# EAGLE board test8_811-3s (EAGLE 6.0)
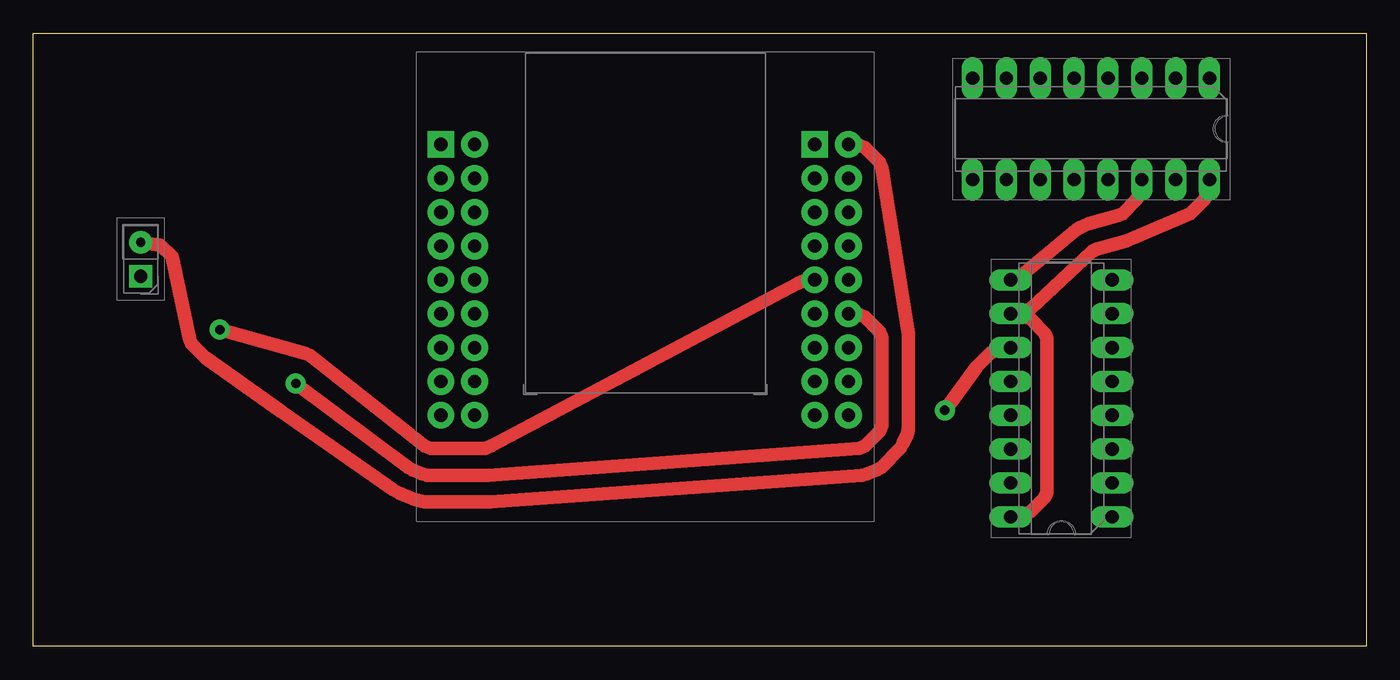
[diagram p0: board, top side]
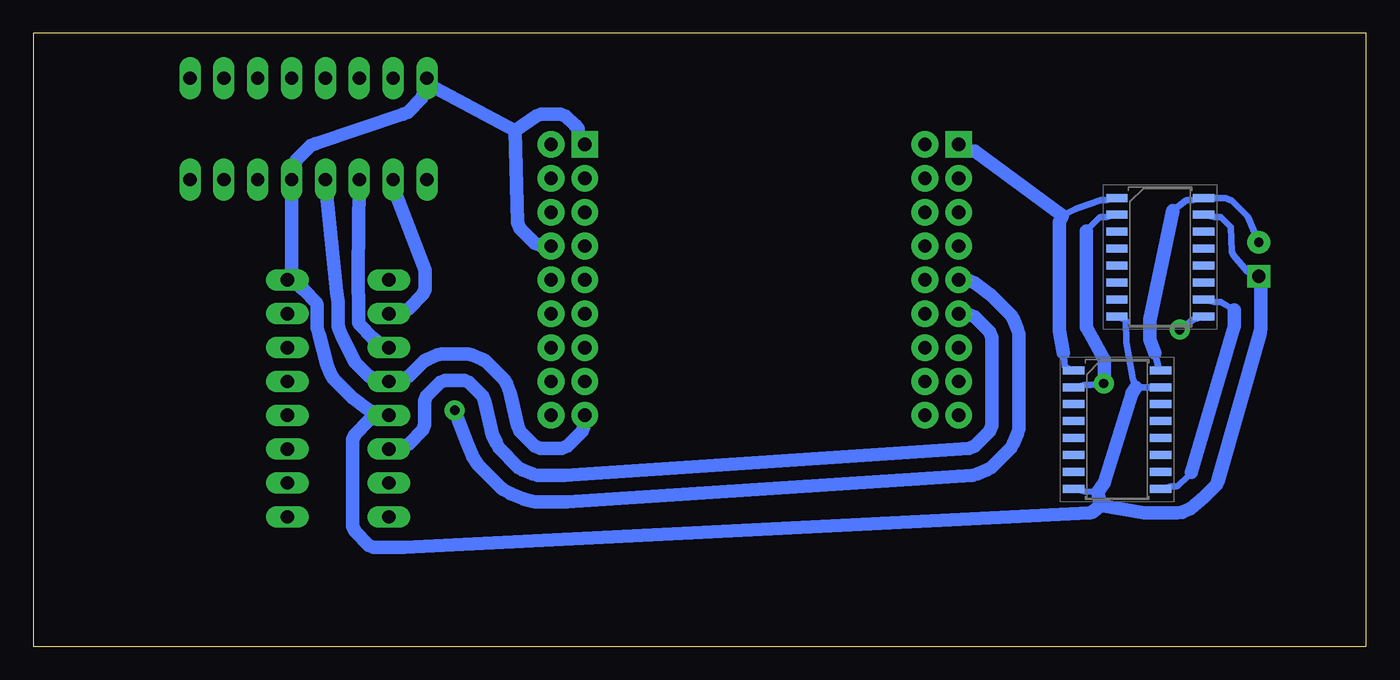
[diagram p1: board, bottom side, seen from below]

Size 100 x 46 mm. Coordinates in mm from the lower left corner, seen from the top.
Outline: 100,0 0,0 0,46 100,46 100,0
Copper layers 1+16: F.Cu 0.0035mm / dielectric 0.15mm / B.Cu 0.0035mm
Design rules: minimum track width 0.5mm, track to track 0.5mm, copper to edge 0.3mm, minimum pad ring 0.1mm, minimum via ring 0.1mm
Net classes: 0 kicad_default: width 0.5 mm, clearance 1 mm; 1 esp: width 0.5 mm, clearance 1 mm to class 0, clearance 0.5 mm

## Footprints (pad centres in the part's own frame; a part is rotated, then mirrored left to right if it is on the bottom)
Connector_PinHeader_2.54mm:PinHeader_1x02_P2.54mm_Vertical = drill 1 pad 1.7 square: 1 0,0 | drill 0.7 pad 1.7: 2 0,-2.54
Package_SO:SOP-16_4.55x10.3mm_P1.27mm = smd 1.601 x 0.601: 1 -3.25,4.445; 2 -3.25,3.175; 3 -3.25,1.905; 4 -3.25,0.635; 5 -3.25,-0.635; 6 -3.25,-1.905; 7 -3.25,-3.175; 8 -3.25,-4.445; 9 3.25,-4.445; 10 3.25,-3.175; 11 3.25,-1.905; 12 3.25,-0.635; 13 3.25,0.635; 14 3.25,1.905; 15 3.25,3.175; 16 3.25,4.445
main:ESP32-WROOM-32 = drill 1 pad 2 square: 1 12.7,12.835; 5 -15.35,12.835 | drill 1 pad 2: 2 15.24,12.835; 3 12.7,10.295; 4 -12.81,12.835; 6 -12.81,10.295; 7 -15.35,10.295; 8 -12.81,7.755; 9 -15.35,7.755; 10 -12.81,5.215; 11 -15.35,5.215; 12 -12.81,2.675; 13 -15.35,2.675; 14 -12.81,0.135; 16 -15.35,0.135; 17 -12.81,-2.405; 18 -15.35,-2.405; 19 -12.81,-4.945; 20 -15.35,-4.945; 21 -12.81,-7.485; 22 -15.35,-7.485; 23 12.7,-7.485; 24 15.24,-7.485; 25 12.7,-4.945; 26 15.24,-4.945; 27 12.7,-2.405; 28 15.24,-2.405; 29 12.7,0.135; 30 15.24,0.135; 31 12.7,2.675; 33 15.24,2.675; 34 15.24,7.755; 35 15.24,10.295; 36 12.7,5.215; 37 12.7,7.755; 38 15.24,5.215
Package_DIP:DIP-16_W7.62mm_LongPads = drill 1 pad 1.6 long: 1 0,0; 2 0,-2.54; 3 0,-5.08; 4 0,-7.62; 5 0,-10.16; 6 0,-12.7; 7 0,-15.24; 8 0,-17.78; 9 7.62,-17.78; 10 7.62,-15.24; 11 7.62,-12.7; 12 7.62,-10.16; 13 7.62,-7.62; 14 7.62,-5.08; 15 7.62,-2.54; 16 7.62,0

## Placement (x,y rotation side)
J1  [Connector_PinHeader_2.54mm:PinHeader_1x02_P2.54mm_Vertical]  8.05,27.77 180 top
U1  [Package_SO:SOP-16_4.55x10.3mm_P1.27mm]  15.45,29.2 0 bottom
U2  [Package_SO:SOP-16_4.55x10.3mm_P1.27mm]  18.69,16.26 0 bottom
U3  [main:ESP32-WROOM-32]  45.92,24.82 0 top
U4  [Package_DIP:DIP-16_W7.62mm_LongPads]  80.94,9.71 180 top
U5  [Package_DIP:DIP-16_W7.62mm_LongPads]  88.25,42.64 270 top

## Library data of the parts
J1 U1-U5 = TopoR

## Nets
+3.3V: J1.2 U1.16 U2.16 U3.2
+5V: U4.10 U4.16 U5.10 U5.16
CLK_165: U1.2 U2.2 U3.30
CS_165: U1.1 U2.1 U3.5
GND: J1.1 U1.8 U1.15 U2.8 U2.15 U3.1 U3.38 U4.8 U4.13 U5.8 U5.13
MISO_165: U1.9 U3.31
Net-(U1-DS): U1.10 U2.9
Net-(U3-IO13) [esp]: U3.16 U4.14
Net-(U3-IO14) [esp]: U3.13 U4.11 U5.11
Net-(U3-IO15) [esp]: U3.23 U4.12 U5.12
Net-(U4-QH'): U4.9 U5.14
unconnected-(U1-D0-Pad11): U1.11
unconnected-(U1-D1-Pad12): U1.12
unconnected-(U1-D2-Pad13): U1.13
unconnected-(U1-D3-Pad14): U1.14
unconnected-(U1-D4-Pad3): U1.3
unconnected-(U1-D5-Pad4): U1.4
unconnected-(U1-D6-Pad5): U1.5
unconnected-(U1-D7-Pad6): U1.6
unconnected-(U1-~{Q7}-Pad7): U1.7
unconnected-(U2-D0-Pad11): U2.11
unconnected-(U2-D1-Pad12): U2.12
unconnected-(U2-D2-Pad13): U2.13
unconnected-(U2-D3-Pad14): U2.14
unconnected-(U2-D4-Pad3): U2.3
unconnected-(U2-D5-Pad4): U2.4
unconnected-(U2-D6-Pad5): U2.5
unconnected-(U2-D7-Pad6): U2.6
unconnected-(U2-DS-Pad10): U2.10
unconnected-(U2-~{Q7}-Pad7): U2.7
unconnected-(U3-EN-Pad3) [esp]: U3.3
unconnected-(U3-IO0-Pad25) [esp]: U3.25
unconnected-(U3-IO2-Pad24) [esp]: U3.24
unconnected-(U3-IO4-Pad26) [esp]: U3.26
unconnected-(U3-IO5-Pad29) [esp]: U3.29
unconnected-(U3-IO12-Pad14) [esp]: U3.14
unconnected-(U3-IO16-Pad27) [esp]: U3.27
unconnected-(U3-IO17-Pad28) [esp]: U3.28
unconnected-(U3-IO21-Pad33) [esp]: U3.33
unconnected-(U3-IO22-Pad36) [esp]: U3.36
unconnected-(U3-IO23-Pad37) [esp]: U3.37
unconnected-(U3-IO25-Pad10) [esp]: U3.10
unconnected-(U3-IO26-Pad11) [esp]: U3.11
unconnected-(U3-IO27-Pad12) [esp]: U3.12
unconnected-(U3-IO32-Pad8) [esp]: U3.8
unconnected-(U3-IO33-Pad9) [esp]: U3.9
unconnected-(U3-IO34-Pad6) [esp]: U3.6
unconnected-(U3-IO35-Pad7) [esp]: U3.7
unconnected-(U3-RXD0{slash}IO3-Pad34) [esp]: U3.34
unconnected-(U3-SCK{slash}CLK-Pad20) [esp]: U3.20
unconnected-(U3-SCS{slash}CMD-Pad19) [esp]: U3.19
unconnected-(U3-SDI{slash}SD1-Pad22) [esp]: U3.22
unconnected-(U3-SDO{slash}SD0-Pad21) [esp]: U3.21
unconnected-(U3-SENSOR_VP-Pad4) [esp]: U3.4
unconnected-(U3-SHD{slash}SD2-Pad17) [esp]: U3.17
unconnected-(U3-SWP{slash}SD3-Pad18) [esp]: U3.18
unconnected-(U3-TXD0{slash}IO1-Pad35) [esp]: U3.35
unconnected-(U4-QA-Pad15): U4.15
unconnected-(U4-QB-Pad1): U4.1
unconnected-(U4-QC-Pad2): U4.2
unconnected-(U4-QD-Pad3): U4.3
unconnected-(U4-QE-Pad4): U4.4
unconnected-(U4-QF-Pad5): U4.5
unconnected-(U4-QG-Pad6): U4.6
unconnected-(U4-QH-Pad7): U4.7
unconnected-(U5-QA-Pad15): U5.15
unconnected-(U5-QB-Pad1): U5.1
unconnected-(U5-QC-Pad2): U5.2
unconnected-(U5-QD-Pad3): U5.3
unconnected-(U5-QE-Pad4): U5.4
unconnected-(U5-QF-Pad5): U5.5
unconnected-(U5-QG-Pad6): U5.6
unconnected-(U5-QH'-Pad9): U5.9
unconnected-(U5-QH-Pad7): U5.7

## Tracks (layer width: path | path; a pad name or v marks a point on that pad's centre or on a via)
+3.3V
  F.Cu 1: J1.2 9.48,30.12 9.56,30.09 10.37,29.28 10.4,29.19 11.74,23.03 11.89,22.67 12.91,21.65 18.61,17.61 26.97,11.78 27.49,11.47 27.58,11.42 28.5,11.04 28.59,11.01 29.19,10.86 29.36,10.83 31.9,10.83 34.32,10.83 62.18,12.83 62.56,12.93 63.29,13.23 63.62,13.43 65.06,14.87 65.26,15.2 65.56,15.93 65.66,16.31 65.66,18.36 65.66,23.44 63.66,35.89 63.47,36.34 62.38,37.42 61.93,37.61 U3.2
  B.Cu 0.5: U2.16 15.59,20.76 15.59,21.01 15.84,22.01 | J1.2 8.88,32.24 8.9,32.28 10.04,33.41 10.08,33.43 10.58,33.64 10.6,33.65 11.4,33.65 U1.16 13,33.47 13.46,33.47 13.52,33.45 14.51,32.7
  B.Cu 1: 15.84,22.01 16.24,23.03 16.24,24.47 14.51,32.7
+5V
  F.Cu 1: U5.16 88.25,34.62 88,33.88 87.85,33.51 86.82,32.47 82.66,30.69 81.96,30.4 79.81,29.79 79.43,29.64 74.84,25.35 74.46,25.19 73.72,24.95 | 73.72,24.95 U4.10 73.72,24.95 | U4.16 73.72,9.71 74.46,9.95 74.84,10.11 75.87,11.14 76.03,11.52 76.03,12.98 76.03,23.14 75.87,23.52 74.84,24.56 74.46,24.71 73.72,24.95
  B.Cu 1: U4.10 72.93,24.95 72.19,25.19 71.81,25.35 70.78,26.38 70.62,26.76 70.62,28.22 72.76,33.88 73,34.62 U5.10
CLK_165  (via drill 0.7 pad 1.5)
  F.Cu 1: U3.30 61.93,24.91 62.38,24.72 63.47,23.64 63.66,23.19 63.66,18.11 63.66,16.56 63.47,16.11 62.38,15.02 61.93,14.83 34.13,12.83 32.09,12.83 29.54,12.83 29.17,12.93 28.44,13.23 28.11,13.43 v19.69,19.71
  B.Cu 0.5: U2.2 21.14,19.61 20.69,19.61 v19.69,19.71 | U1.2 19.5,32.2 19.91,32.2 20.02,32.18 20.75,31.45 21.01,31.14
  B.Cu 1: 21.01,31.14 21,24.03 20.99,23.97 20.96,23.89 19.68,21.57 19.65,21.49 19.64,21.43 19.64,21.13 19.64,19.98 v19.69,19.71
CS_165
  B.Cu 0.5: U2.1 22.62,21 22.73,22.01 | U1.1 19.5,33.47 19.89,33.47 21.63,32.89 21.81,32.82 22.79,32.33
  B.Cu 1: U3.5 30.07,37.15 29.57,37.15 29.36,37.15 22.79,32.33 22.9,32.08 23.01,31.82 23.01,30.47 23,23.71 22.73,22.01
GND
  B.Cu 0.5: U1.15 11.41,32.2 10.89,32.2 10.16,31.47 10.16,31.45 10.1,29.63 9.98,29.34 8.9,28.12 8.65,28.12 J1.1 | U2.8 21.14,11.64 20.14,11.57 | U1.8 18.03,24.46 17.99,22.79 17.49,20.04 17.48,19.98 17.29,19.44 16.24,19.44 U2.15
  B.Cu 1: 19.93,10.58 20.52,10.09 20.57,10.06 20.66,10.03 20.71,10.02 72.19,7.41 72.99,7.41 74.46,7.41 74.84,7.57 75.87,8.6 76.03,8.98 76.03,10.44 76.03,15.53 75.87,15.9 74.84,16.94 74.46,17.09 73.72,17.33 | 73.72,17.33 U4.13 73.72,17.33 | 70.47,42.24 70.71,41.5 70.86,41.13 71.89,40.09 72.27,39.94 78.82,37.72 79.2,37.56 80.23,36.53 80.38,36.15 80.62,35.42 U5.13 80.62,34.62 80.62,27.49 U4.8 80.54,27.49 79.69,26.72 78.78,25.81 78.69,25.6 78.69,23.87 78.57,23.41 77.94,21.08 77.65,20.37 77.47,20.07 76.06,18.67 74.84,17.73 74.46,17.57 73.72,17.33 | 70.47,42.24 U5.8 70.47,42.24 | U3.1 59.12,38.15 59.12,38.65 59.12,38.86 59.41,39.15 60.05,39.79 60.43,39.95 61.89,39.95 62.27,39.79 63.85,38.69 | 19.93,10.58 20.14,11.57 20.12,11.6 19.68,12.22 19.65,12.3 17.59,18.92 17.57,18.95 17.29,19.44 | 63.85,38.69 70.47,42.24 | J1.1 7.9,27.42 7.9,26.92 7.9,24.54 7.9,23.86 7.93,23.62 7.98,23.44 11.14,12.38 11.25,12.11 12.19,11.17 13.17,10.33 13.23,10.29 13.74,10.08 13.81,10.06 14.21,10.02 15.51,10.02 16.66,10.02 19.93,10.58 | U3.38 61.93,30.07 62.38,30.26 63.47,31.35 63.66,31.8 63.85,38.69
MISO_165  (via drill 0.7 pad 1.5)
  F.Cu 1: v13.99,23.75 20.41,21.96 20.77,21.81 29.34,15.02 29.8,14.83 32.34,14.83 33.88,14.83 34.33,15.02 57.4,27.27 57.85,27.45 U3.31
  B.Cu 0.5: U1.9 12.98,24.53 v13.99,23.75
Net-(U1-DS)
  B.Cu 0.5: U2.9 14.64,12 14.24,12 14.12,12.02 13.39,12.75 13.14,13.06 | U1.10 11.41,25.85 10.89,25.85 9.9,25.22
  B.Cu 1: 13.14,13.06 9.9,24.03 9.9,25.22
Net-(U3-IO13)
  B.Cu 1: U3.16 29.8,24.91 29.34,24.72 28.26,23.64 28.07,23.19 28.07,18.11 28.07,16.56 28.26,16.11 29.34,15.02 29.8,14.83 60.13,12.83 62.18,12.83 62.56,12.93 63.29,13.23 63.62,13.43 65.06,14.87 65.26,15.2 65.56,15.93 65.66,16.31 66.14,18.42 66.28,18.78 67.3,19.8 67.66,19.95 69.1,19.95 69.46,19.8 70.48,18.78 70.63,18.42 70.63,16.6 70.78,16.22 71.82,15.19 72.19,15.03 72.93,14.79 U4.14
Net-(U3-IO14)  (via drill 0.7 pad 1.5)
  F.Cu 1: U4.11 72.93,22.41 72.19,22.17 71.81,22.02 70.78,20.98 v68.38,17.7
  B.Cu 1: v68.38,17.7 67.45,15.26 67.07,14.34 67.03,14.25 66.71,13.73 66.61,13.58 64.91,11.88 64.76,11.78 64.24,11.47 64.15,11.42 63.23,11.04 63.13,11.01 62.54,10.86 62.37,10.83 59.95,10.83 29.54,12.83 29.17,12.93 28.44,13.23 28.11,13.43 26.66,14.87 26.47,15.2 26.16,15.93 26.07,16.31 26.07,18.36 26.07,23.44 26.16,23.81 26.47,24.54 26.66,24.87 28.11,26.32 29.34,27.27 29.8,27.45 U3.13 | U5.11 75.54,34.62 75.63,28.15 75.63,26.84 75.58,26.03 75.58,24.31 75.49,24.09 74.58,23.19 73.72,22.41 U4.11
Net-(U3-IO15)
  B.Cu 1: U5.12 78.09,34.62 77.24,26.59 77.13,25.84 77.13,24.06 77.09,23.89 76.85,23.31 75.87,21.3 74.84,20.27 74.46,20.11 73.72,19.87 U4.12 72.93,19.87 72.19,20.11 71.82,20.27 70.69,21.4 70.4,21.57 69.7,21.86 69.38,21.94 67.39,21.94 67.06,21.86 66.37,21.57 66.08,21.4 64.68,20 64.51,19.72 64.22,19.02 64.14,18.69 63.66,16.56 63.47,16.11 62.38,15.02 61.93,14.83 60.39,14.83 59.94,15.02 58.85,16.11 58.66,16.56 U3.23
Net-(U4-QH')
  F.Cu 1: U5.14 83.16,34.62 82.93,33.88 82.77,33.51 81.74,32.47 81.36,32.32 79.21,31.71 78.5,31.42 78.21,31.24 73.72,27.49 U4.9